# EAGLE board Buffered mult rev 2 (EAGLE 7.5.0)

Size 103 x 14.95 mm. Coordinates in mm from the lower left corner, seen from the top.
Outline: 103,0 102.97,14.95 0,14.95 0,0 103,0
Copper layers (1*16): Top 0.035mm / dielectric 1.5mm / Bottom 0.035mm
Design rules "default": minimum track width 10mil, minimum drill 24mil, track to track 8mil, track to pad 8mil, pad to pad 8mil, via to via 8mil, smd to smd 8mil, copper to edge 40mil, drill to drill 8mil, minimum pad ring 10mil, minimum via ring 8mil, stop-mask expansion 4mil, vias tented up to drill 0mil, thermal gap 10mil

## Footprints (pad centres in the part's own frame; a part is rotated, then mirrored left to right if it is on the bottom)
PANASONIC_D = smd 3 x 1.4: + 2.4,0; - -2.4,0
1206 = smd 1.6 x 1.8: 1 -1.4,0; 2 1.4,0
SOD123 = smd 1.4 x 1.4: A 1.9,0; C -1.9,0
THONKICONN = drill 1.35 square: P$1_SLEEVE 0,-6.48 | drill 1.55 square: P$2_SWITCH 0,-3.38; P$3_TIP 0,4.84
2X05_EUROPWR_SMD = smd 1.016 x 3.15: 1 -5.08,-2.54; 2 -5.08,2.54; 3 -2.54,-2.54; 4 -2.54,2.54; 5 0,-2.54; 6 0,2.54; 7 2.54,-2.54; 8 2.54,2.54; 9 5.08,-2.54; 10 5.08,2.54
SO08 = smd 0.6 x 2.2: 1 -1.905,-2.6; 2 -0.635,-2.6; 3 0.635,-2.6; 4 1.905,-2.6; 5 1.905,2.6; 6 0.635,2.6; 7 -0.635,2.6; 8 -1.905,2.6

## Placement (x,y rotation side)
C1  47u  [PANASONIC_D]  16.26,4.52 270 top
C2  100n  [1206]  37.11,26.67 0 bottom  (outside the outline)
C3  100n  [1206]  28.46,26.39 0 bottom  (outside the outline)
C4  100n  [1206]  78.7,25.3 180 bottom  (outside the outline)
C5  100n  [1206]  66.2,58.9 90 bottom  (outside the outline)
C6  100n  [1206]  70.2,31.3 90 bottom  (outside the outline)
C7  100n  [1206]  19.1,60.1 90 bottom  (outside the outline)
C13  47u  [PANASONIC_D]  23.16,4.83 270 top
D1  1N5819HW  [SOD123]  16.06,11.14 0 top
D2  1N5819HW  [SOD123]  22.76,11.04 0 top
FRAME1  FRAME-LETTER  [CREATIVE_COMMONS]  4.1,17.9 0 top
IN1  THONKICONNOLD  [THONKICONN]  32.4,7.8 0 top
IN2  THONKICONNOLD  [THONKICONN]  69.7,7.8 0 top
J1  EUROPWR_2X05-SMD  [2X05_EUROPWR_SMD]  23,6.9 270 bottom
R1  1k  [1206]  51.28,8.59 0 bottom
R2  1k  [1206]  60,8.39 0 bottom
R3  1k  [1206]  45.82,8.49 0 bottom
R4  1k  [1206]  81.94,8.39 0 bottom
R5  1k  [1206]  87.36,8.49 0 bottom
R6  1k  [1206]  93.08,8.29 0 bottom
R7  4.7m  [1206]  37.3,44.39 0 top  (outside the outline)
R8  4.7m  [1206]  61.62,44.89 0 top  (outside the outline)
U1  TL072_SMD  [SO08]  37.6,8 0 bottom
U2  TL072_SMD  [SO08]  65.1,7.7 180 bottom
U3  TL072_SMD  [SO08]  74.22,7.85 0 bottom

## Library data of the parts
C1 C13 = rcl
C2-C7 = SparkFun-Capacitors
D1 D2 = diode
FRAME1 = SparkFun-Aesthetics
IN1 IN2 U1-U3 = MusicThingModular
J1 = tsyklon-labs
R1-R8 = SparkFun-Passives

## Nets
GND: C1.- C2.1 C3.1 C4.1 C5.1 C6.1 C7.1 C13.+ IN1.P$1_SLEEVE IN2.P$1_SLEEVE J1.3 J1.4 J1.5 J1.6 J1.7 J1.8 R7.1 R8.1 U1.4 U1.8 U2.4 U2.8 U3.4 U3.8
N$1: R6.2
N$2: R3.1 U1.1 U1.2
N$3: R5.2
N$4: R4.2
N$5: IN1.P$3_TIP IN2.P$2_SWITCH R7.2 U1.3 U1.5 U2.3
N$6: R2.1 U2.1 U2.2
N$7: R1.2
N$8: R2.2
N$9: R3.2
N$10: R1.1 U1.6 U1.7
N$11: IN2.P$3_TIP R8.2 U2.5 U3.3 U3.5
N$12: R6.1 U3.6 U3.7
N$13: R5.1 U3.1 U3.2
N$14: D2.C J1.9 J1.10
N$15: D1.A J1.1 J1.2
N$17: R4.1 U2.6 U2.7
VCC: C1.+ D1.C
VEE: C13.- D2.A

## Tracks (layer width: path | path; a pad name or v marks a point on that pad's centre or on a via)
GND  (23 unrouted)
N$2  (2 unrouted)
N$5  (5 unrouted)
N$6  (2 unrouted)
N$10  (2 unrouted)
N$11  (4 unrouted)
N$12  (2 unrouted)
N$13  (2 unrouted)
N$14  (2 unrouted)
N$15  (2 unrouted)
N$17  (2 unrouted)
VCC  (1 unrouted)
VEE  (1 unrouted)